# Altium PCB PCB_Attiny_composant.PcbDoc
Units mm, origin at the board's own origin, x right, y up, seen from the top; angles counter-clockwise.
Board outline 57.91 x 55.63 mm, 2 copper layers (Top Layer, Bottom Layer); 20 components, 23 nets, 92 pads, 17 vias.
Unrouted connection lines stored in the file: 3.
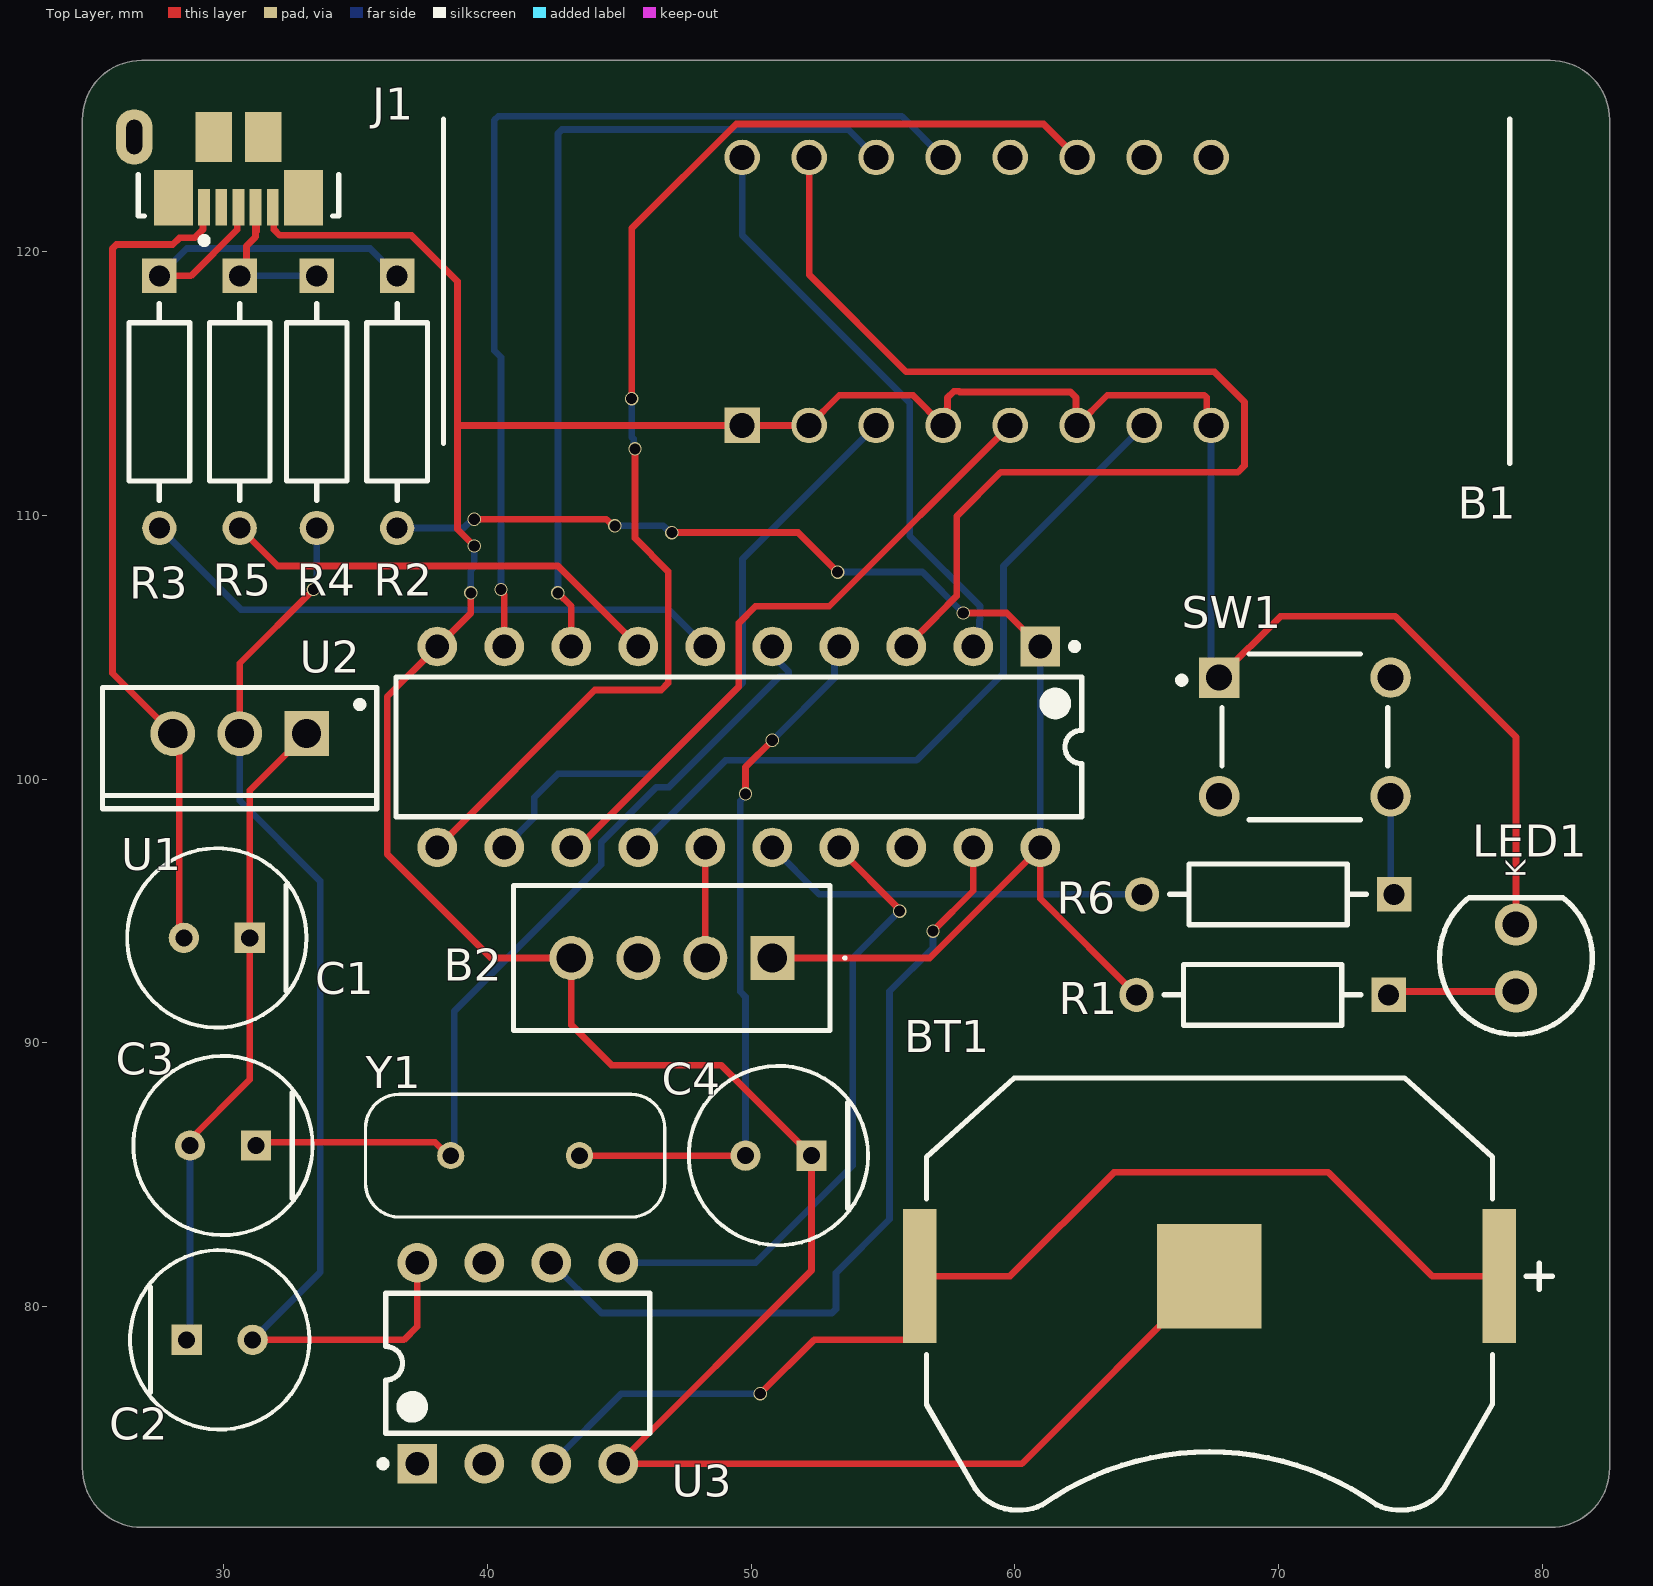
[diagram p0: Top Layer view]
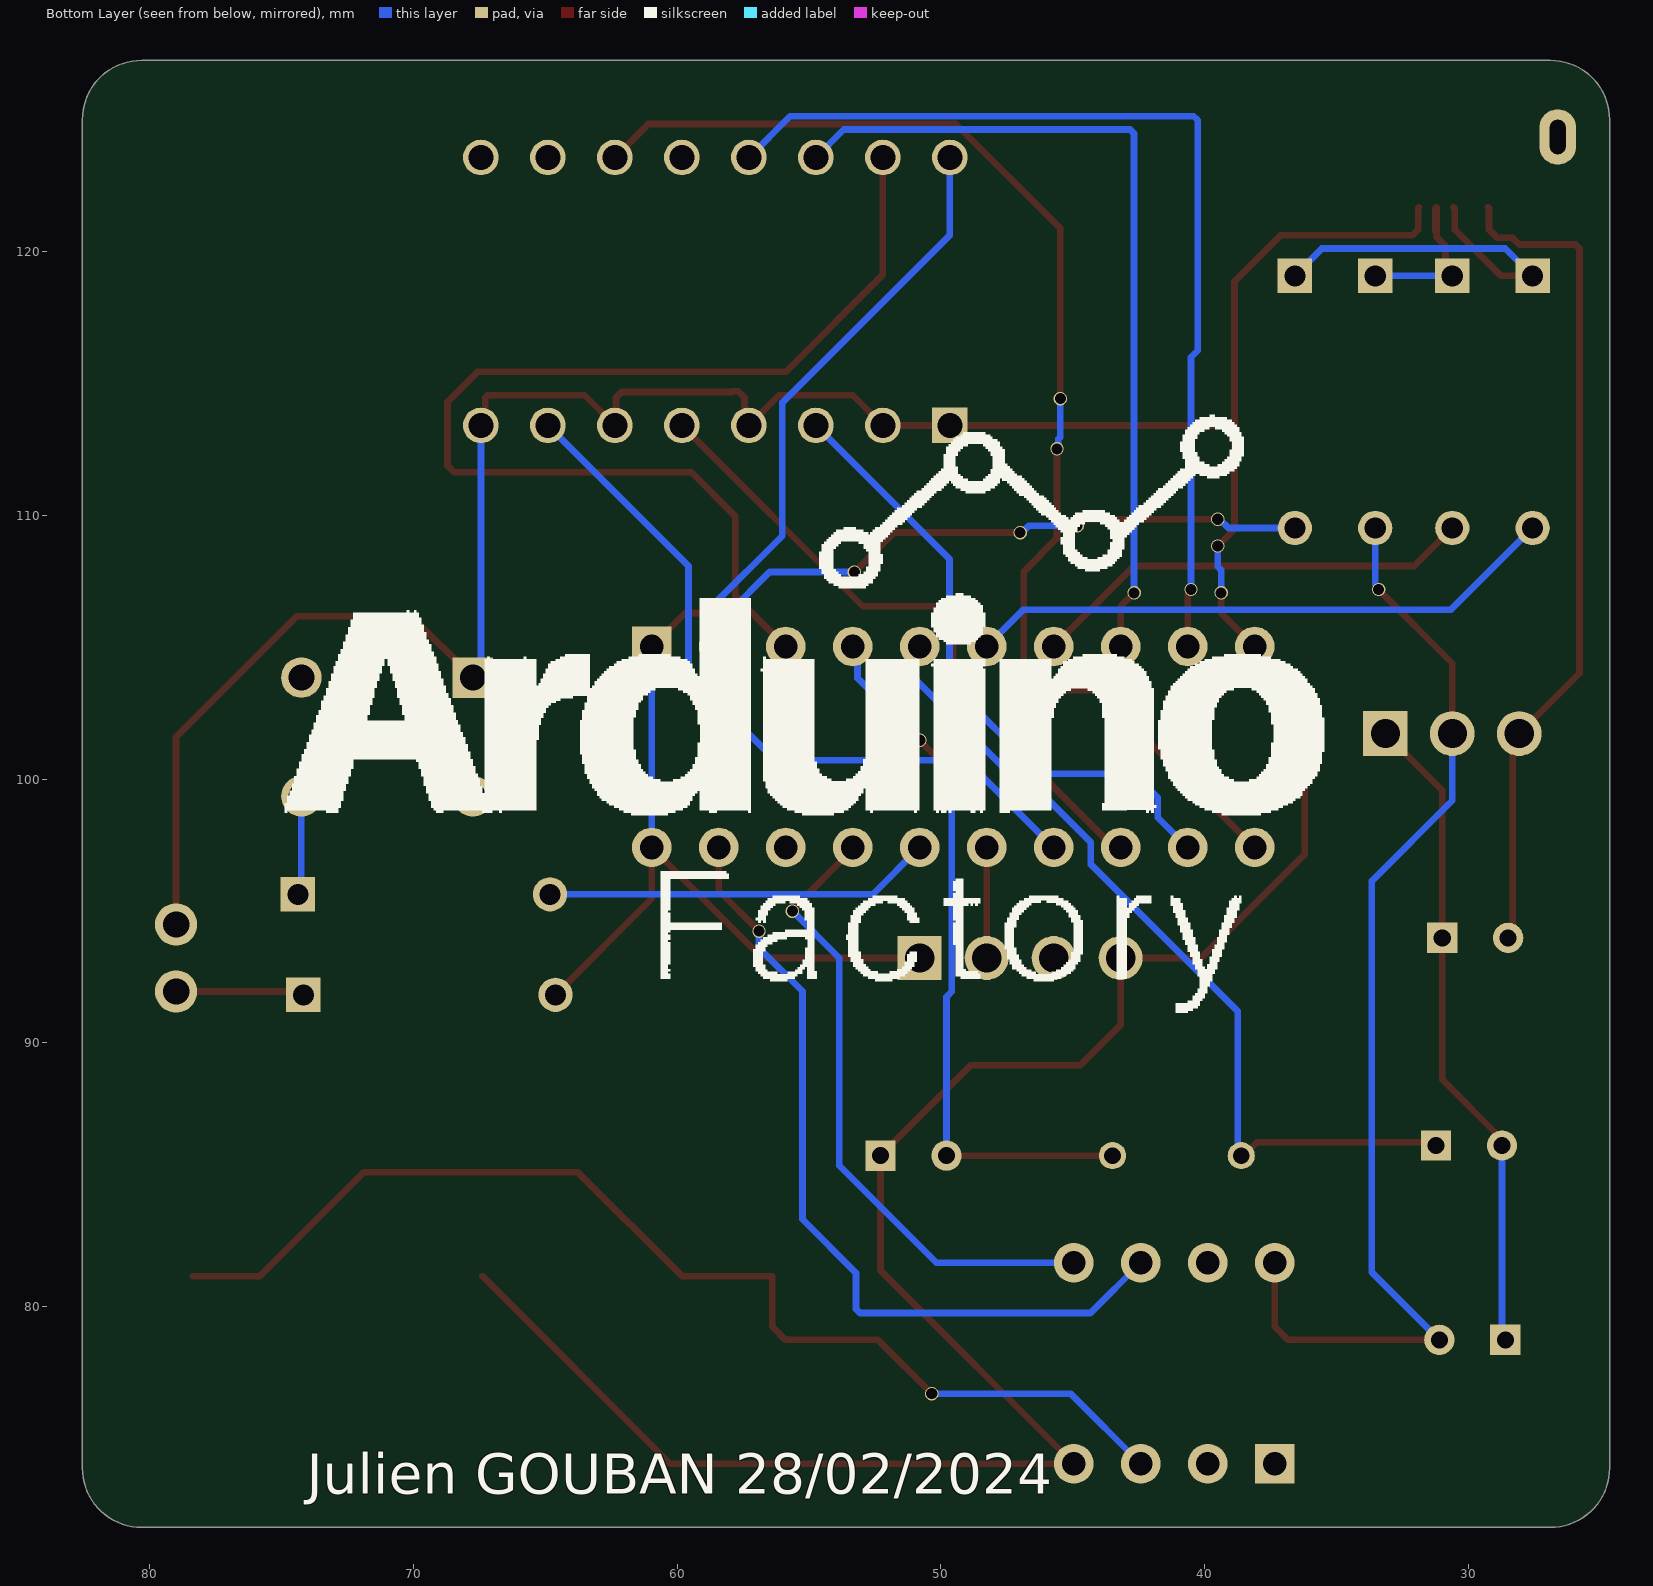
[diagram p1: Bottom Layer view, seen from below]
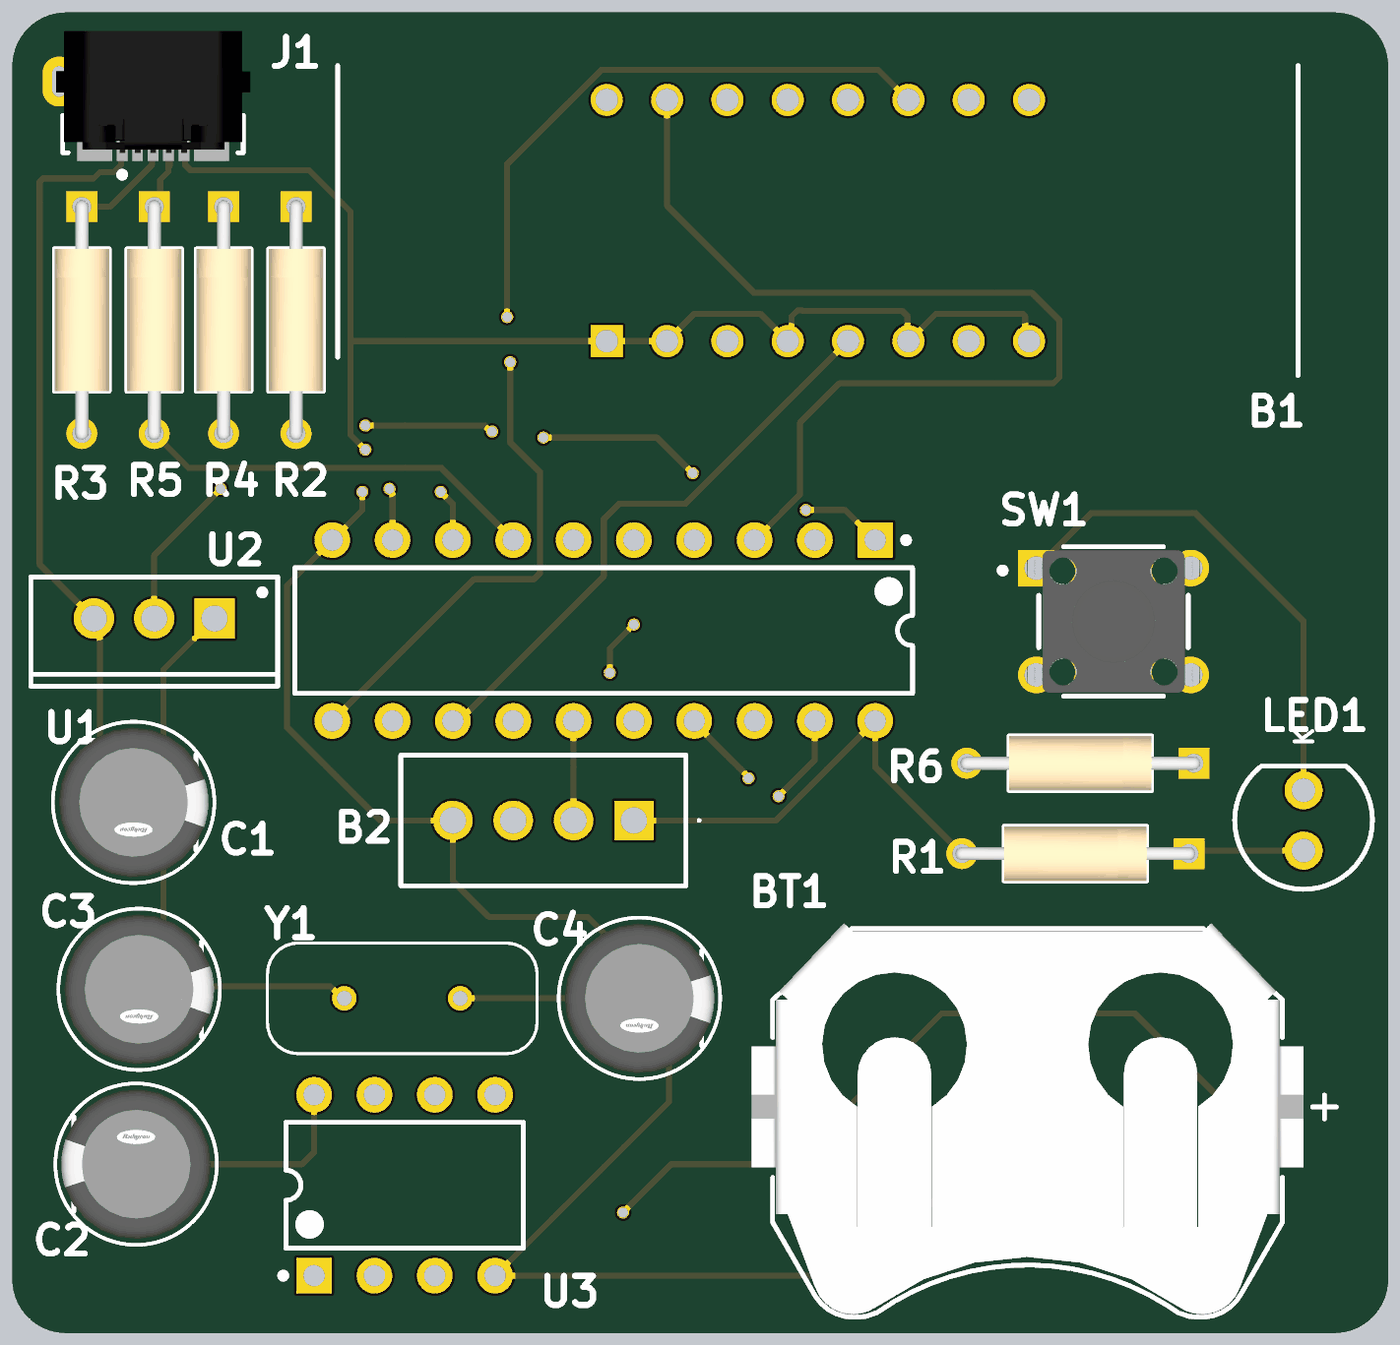
[diagram p2: 3D render of the assembled board from above, using the file's embedded part models]

## Layer stack, top to bottom
Top Solder: solder mask 0.0102, Solder Resist, Dk 3.5
Top Layer: signal copper 0.0356
Dielectric 1: dielectric 0.32, FR-4, Dk 4.8
Bottom Layer: signal copper 0.0356
Bottom Solder: solder mask 0.0102, Solder Resist, Dk 3.5

## Board outline
24.638,73.882 24.638,125 cw(c26.892,125) 26.892,127.254 80.296,127.254 cw(c80.296,125) 82.55,125 82.55,73.882 cw(c80.296,73.882) 80.296,71.628 26.892,71.628 cw(c26.892,73.882)

## Design rules (kind name [scope] priority, off if disabled: settings)
Clearance Clearance_1 [OnMid vs OnMid] p1: gap=0.254 ignorepadtopadclearanceinfootprint=FALSE sourcerule=36 cellrowname=All cellrowtype=0 cellcolname=All cellcoltype=0 innerlayers=TRUE
Clearance Clearance_2 [(ExistsOnLayer('Top Layer') Or ExistsOnLayer('Bottom Layer')) vs (ExistsOnLayer('Top Layer') Or ExistsOnLayer('Bottom Layer'))] p2: gap=0.254 ignorepadtopadclearanceinfootprint=FALSE sourcerule=36 cellrowname=All cellrowtype=0 cellcolname=All cellcoltype=0 outerlayers=TRUE
Clearance [All] p3: gap=0.254 ignorepadtopadclearanceinfootprint=FALSE ismatrix=TRUE
ComponentClearance [All] p1: gap=0 collisioncheckmode=3 verticalgap=0 showdistances=TRUE
PolygonConnect [All] p1: connectstyle=Relief reliefconductorwidth=0.254 reliefentries=4 polygonreliefangle="90 Angle" airgapwidth=0.254
RoutingVias [All] p1: holewidth=0.711 width=1.27 viastyle="Through Hole" minholewidth=0.711 minwidth=1.27 maxholewidth=0.711 maxwidth=1.27
SolderMaskExpansion [All] p1: expansion=0.102 istentingtop=FALSE
Width [All] p1: maxlimit=0.254 minlimit=0.254 preferedwidth=0.254
29 further rules are at their usual default settings.

## Classes and differential pairs
component class Capteur_et_RTC: B2 BT1 R6 SW1 U3
component class Afficheur_7_segments: B1
component class Schema_Attiny_composant: C1 C2 C3 C4 J1 LED1 R1 R2 R3 R4 R5 U1 U2 Y1

## Components (designator, comment, footprint, x,y, rotation, side; value= is the part's Value field where it differs from the comment)
B1 "LTC-4727JR" DIP1016W75P254L4018H725Q16N 58.547,118.491 r90 top
B2 "Capteur température DHT11" 386 50.8,93.218 r180 top
BT1 "3034TR" Keystone_0_MFG 67.374,80.48 r180 top
C1 "10uF" Rubycon_0_MFG 29.738,93.98 r180 top
C2 "10uF" Rubycon_0_MFG 29.845,78.74 r0 top
C3 "27uF" Rubycon_0_MFG 29.972,86.106 r180 top
C4 "27uF" Rubycon_0_MFG 51.034,85.725 r180 top
J1 "105164-0001" Molex_105164-0001_0 30.558,124.697 r270 top
LED1 "151051RS11000" "Type 5mm" 78.994,93.218 r90 top
R1 "68ohms" Stackpole_Electronics_Inc._CF14JT1K00_0 69.388,91.821 r180 top
R2 "1M" Stackpole_Electronics_Inc._CF14JT1K00_0 36.576,114.3 r270 top
R3 "68ohms" Stackpole_Electronics_Inc._CF14JT1K00_0 27.559,114.3 r270 top
R4 "1K5" Stackpole_Electronics_Inc._CF14JT1K00_0 33.528,114.3 r270 top
R5 "68ohms" Stackpole_Electronics_Inc._CF14JT1K00_0 30.607,114.3 r270 top
R6 "10kohms" Stackpole_Electronics_Inc._CF14JT1K00_0 69.596,95.631 r180 top
SW1 "1825910-2" TE_0_0 70.993,101.6 r0 top
U1 "LD1086V33" TO220 30.607,101.727 r180 top
U2 "ATtiny2313A-PU" 20P3 49.53,101.219 r270 top
U3 "DS1307N" P8-2 41.148,77.851 r90 top
Y1 "ECS-120-S-4X" XTAL_ECS-120-S-4X 41.048,85.725 r180 top

## Footprints (in the part's own frame and the unit in brackets; to place one, negate y for a bottom-side part, rotate by r counter-clockwise, add the part's x,y. Pads: shape width x height; smd on the part's side, far side on the other; paste and mask are expansions set on the pad)
20P3 [mm] "DIP, 20-Pin, Row Spacing 7.62 mm, Pitch 2.54 mm"
  rect 1.5x1.5 hole 0.9: 1(-3.81,11.43)
  round 1.5 hole 0.9: 2(-3.81,8.89) 3(-3.81,6.35) 4(-3.81,3.81) 5(-3.81,1.27) 6(-3.81,-1.27) 7(-3.81,-3.81) 8(-3.81,-6.35) 9(-3.81,-8.89) 10(-3.81,-11.43) 11(3.81,-11.43) 12(3.81,-8.89) 13(3.81,-6.35) 14(3.81,-3.81) 15(3.81,-1.27) 16(3.81,1.27) 17(3.81,3.81) 18(3.81,6.35) 19(3.81,8.89) 20(3.81,11.43)
  silkscreen extent -3.93,-13 2.65,13, body extent -3.6,-12.95 3.6,12.95, height 5.08
386 [mm]
  rect 1.665x1.665 hole 1.11: 1(0,0)
  round 1.665 hole 1.11: 2(2.54,0) 3(5.08,0) 4(7.62,0)
  silkscreen extent -2.8,-2.75 9.81,2.75
DIP1016W75P254L4018H725Q16N [mm]
  rect 1.35x1.35 / inner round 1.35 / far side rect 1.35x1.35 hole 0.95: 1(-5.08,8.89)
  round 1.35 hole 0.95: 2(-5.08,6.35) 3(-5.08,3.81) 4(-5.08,1.27) 5(-5.08,-1.27) 6(-5.08,-3.81) 7(-5.08,-6.35) 8(-5.08,-8.89) 9(5.08,-8.89) 10(5.08,-6.35) 11(5.08,-3.81) 12(5.08,-1.27) 13(5.08,1.27) 14(5.08,3.81) 15(5.08,6.35) 16(5.08,8.89)
  silkscreen extent -6.53,-20.21 6.53,20.21
Keystone_0_MFG [mil]
  rect 156x156 smd paste-39370.1 mask+0: 1(0,-26.5)
  rect 50x200 smd paste+0 mask+0: 2(-432.48,-26.5) 2(432.48,-26.5)
  silkscreen extent -512,-322 422,323, body extent -461,-326 461,326, height 10
Molex_105164-0001_0 [mm]
  rect 1.38x0.45 smd paste+0 mask+0: 1(3.01,-1.3) 2(3.01,-0.65) 3(3.01,0) 4(3.01,0.65) 5(3.01,1.3)
  rect 2.1x1.475 smd paste+0 mask+0: 7(2.65,2.462) 10(2.65,-2.462)
  rect 1.9x1.375 smd paste+0 mask+0: 8(0.35,0.937) 9(0.35,-0.937)
  oval 2.1x1.4 hole 0.6 slot 1.3 at 0 deg paste-2539.97 mask+0: 11(0.35,-3.95)
  silkscreen extent 1.78,-3.8 4.4,3.8, body extent -2.05,-4.75 3.8,4.75, height 0.25
P8-2 [mm] "DIP, 8-Leads, Row Spacing 7.62mm, Pitch 2.54mm, Body 9.4x7mm"
  rect 1.5x1.5 hole 0.9: 1(-3.81,3.81)
  round 1.5 hole 0.9: 2(-3.81,1.27) 3(-3.81,-1.27) 4(-3.81,-3.81) 5(3.81,-3.81) 6(3.81,-1.27) 7(3.81,1.27) 8(3.81,3.81)
  silkscreen extent -3.93,-5 2.65,5.23
Rubycon_0_MFG [mm]
  rect 1.15x1.15 hole 0.65 paste-2539.97 mask+0: 1(-1.25,0)
  round 1.15 hole 0.65 paste-2539.97 mask+0: 2(1.25,0)
  silkscreen extent -3.4,-3.4 3.4,3.4, body extent -3.5,-3.5 3.5,3.5, height 0.25
Stackpole_Electronics_Inc._CF14JT1K00_0 [mm]
  rect 1.3x1.3 hole 0.8 paste-2539.97 mask+0: 1(-4.78,0)
  round 1.3 hole 0.8 paste-2539.97 mask+0: 2(4.78,0)
  silkscreen extent -3.73,-1.15 3.73,1.15, body extent -5.53,-1.4 5.53,1.4, height 0.25
TE_0_0 [mm]
  rect 1.54x1.54 hole 0.99 paste-2539.97 mask+0: 1(-3.25,2.25)
  round 1.54 hole 0.99 paste-2539.97 mask+0: 2(3.25,2.25) 3(-3.25,-2.25) 4(3.25,-2.25)
  silkscreen extent -4.79,-3.15 3.15,3.15, body extent -4.12,-3.24 4.12,3.24, height 0.25
TO220 [mm] "TO, Thru-Hole, Vertical, Heatsink Mounted; 3 In-Line Leads; Pitch 2.54 mm"
  rect 1.7x1.7 hole 1.1: 1(-2.54,0)
  round 1.7 hole 1.1: 2(0,0) 3(2.54,0)
  silkscreen extent -5.2,-1.75 5.2,2.85, body extent -5.25,-1.8 5.25,2.9, height 19.7
"Type 5mm" [mm] "THT, LED-5mm, 2pin- Body 5.8mm"
  round 1.6 hole 1: 1(1.27,0) 2(-1.27,0)
  silkscreen extent -2.9,-2.9 2.29,2.9
XTAL_ECS-120-S-4X [mm]
  round 1.03 hole 0.63: 1(-2.44,0) 2(2.44,0)
  silkscreen extent -5.68,-2.33 5.68,2.33

## Part data
B1: "Displays Panel 4DIGIT 35LED Sup. Red CC 14-Pin DIP Module", Manufacturer_Name=Lite-On, Mouser Part Number=859-LTC-4727JR, Arrow Part Number=LTC-4727JR, Arrow Price/Stock=https://www.arrow.com/en/products/ltc-4727jr/lite-on-technology?region=nac, Datasheet Link=https://componentsearchengine.com/Datasheets/1/LTC-4727JR.pdf, Geometry.Height=7.25mm, Manufacturer_Part_Number=LTC-4727JR, Mouser Price/Stock=https://www.mouser.co.uk/ProductDetail/Lite-On/LTC-4727JR?qs=WxFF5lh7QM1aHvF1YvDORQ%3D%3D
B2: library part 386, "Adafruit Accessories DHT11 Basic Temp Humidity Sensor", Manufacturer_Name=Adafruit, Mouser Part Number=485-386, Arrow Part Number=386, Arrow Price/Stock=https://www.arrow.com/en/products/386/adafruit-industries?region=nac, Datasheet Link=https://datasheet.datasheetarchive.com/originals/distributors/DKDS-1/1982.pdf, Geometry.Height=15.5mm, Manufacturer_Part_Number=386, Mouser Price/Stock=https://www.mouser.co.uk/ProductDetail/Adafruit/386?qs=GURawfaeGuDbeGFpZ2393w%3D%3D
C1 C2 C3 C4: library part 35ZLH100MEFC6_3X11
LED1: "THT LED round mono-color color lens, WL-TMRW, Red", Emitting color=Red, Manufacturer="Wuerth Elektronik", ComponentLink1Description="Manufacturer URL", ComponentLink1URL=http://www.we-online.com, ComponentLink2Description=Datasheet, ComponentLink2URL=http://katalog.we-online.de/pbs/datasheet/7448042001.pdfhttp://katalog.we-online.de/pbs/datasheet/7448042001.pdfhttp://katalog.we-online.de/pbs/datasheet/7448042001.pdfhttp://katalog.we-online.de/pbs/datasheet/151051RS11000.pdf, PackageReference="Type 5mm", PartNumber=151051RS11000
R1 R2 R3 R4 R5 R6: library part MF0207FTE52-10K
U1: "1.5A, Low Drop Positive Voltage Regulator, 3.3V, 3-Pin TO-220", ComponentLink1Description="Manufacturer URL", ComponentLink1URL=http://www.st.com, ComponentLink2Description=Datasheet, ComponentLink2URL=http://www.st.com/internet/com/TECHNICAL_RESOURCES/TECHNICAL_LITERATURE/DATASHEET/CD00001884.pdf, ComponentLink3Description="Package Specification", ComponentLink3URL=http://www.st.com/internet/com/TECHNICAL_RESOURCES/TECHNICAL_LITERATURE/PACKAGE_INFORMATION/CD00004649.pdf, DatasheetVersion=11/07/2011, PackageDescription="TO, Thru-Hole, Vertical, Heatsink Mounted; 3 In-Line Leads; Pitch 2.54 mm", PackageReference=TO220, PackageVersion=ver3.0, PartNumber=LD1086V33
U2: library part ATTINY2313A-PU, "8-bit AVR Microcontroller, 1.8-5.5V, 2KB Flash, 128 Bytes EEPROM, 128 Bytes SRAM, 20-pin PDIP, Industrial Grade (-40°C to 85°C), Pb-Free", Code_JEDEC=MS-001-AD, DatasheetVersion="revA, Dec-2009", PackageDescription="20-lead (0.300\"/7.62mm Wide) Plastic Dual Inline Package (PDIP)", PackageReference=20P3, PackageVersion="revC, Jan-2004", PartNumber=ATTINY2313A-PU
U3: "64 x 8, Serial, I2C Real-Time Clock, 5.0V, 8-Pin PDIP, -40 to 85 degC", Code_JEDEC=MS-001-AB, ComponentLink1Description="Manufacturer URL", ComponentLink1URL=http://www.maxim-ic.com, ComponentLink2Description=Datasheet, ComponentLink2URL=http://datasheets.maxim-ic.com/en/ds/DS1307.pdf, ComponentLink3Description="Package Specification", ComponentLink3URL=http://pdfserv.maxim-ic.com/package_dwgs/21-0043.PDF, DatasheetVersion=10-Feb-2008, PackageDescription="8-Pin Plastic Dual-In-Line, Narrow (0.3in), Pitch 2.54 mm, PDIP(N)", PackageReference=P8-2, PackageVersion="revE, 2011", PartNumber=DS1307N
Y1: "CRYSTAL T/H", Package=None, Availability=Unavailable, MP=ECS-120-S-4X, Price=None

## Via types
v1: diameter 0.508, hole 0.422, Top Layer to Bottom Layer, 16 vias
v2: diameter 0.508, hole 0.42, Top Layer to Bottom Layer, 1 vias

## Nets (pads, with @x,y where several pads share a name; then routed paths per layer and width w, separated by ;. In a path a pad name is that pad's centre, name@x,y a point inside that pad or via, vN(x,y) a via of type N, cw(c..) or ccw(c..) an arc to the next point about the centre after c; other vN are vias at no path point)
+3.3V: B2.1 C2.2 R1.2 R2.2 R4.2 R6.1 SW1.4 U1.2 U2.1 U2.20 U3.8 | length 100.1
  Top Layer w0.254: U1.2 30.607,104.394 v1(33.401,107.188) ; C2.2 36.83,78.74 37.338,79.248 U3.8 ; v1(39.497,109.855) 44.508,109.855 44.762,109.601 v1(44.831,109.601) ; v1(46.99,109.347) 51.78,109.347 v1(53.277,107.85) ; B2.1 56.769,93.218 U2.20 60.96,95.469 R1.2 ; v1(58.039,106.299) 59.69,106.299 U2.1
  Bottom Layer w0.254: U1.2 30.607,99.187 33.655,96.139 33.655,81.3 C2.2 ; v1(33.401,107.188) 33.401,107.257 33.528,107.384 R4.2 ; R2.2 39.093,109.52 39.428,109.855 v1(39.497,109.855) ; v1(44.831,109.601) 46.667,109.601 46.921,109.347 v1(46.99,109.347) ; v1(53.277,107.85) 56.488,107.85 v1(58.039,106.299) ; U2.20 U2.1 ; SW1.4 74.243,95.764 R6.1
ANODE_ALI: B1.14 U2.8 | length 32.2
  Top Layer w0.254: v1(42.672,107.061) 43.18,106.553 U2.8
  Bottom Layer w0.254: v1(42.672,107.061) 42.672,124.478 42.821,124.627 53.681,124.627 B1.14
ANODE_BL2: B1.16 U2.2 | length 22.4
  Bottom Layer w0.254: B1.16 49.657,120.629 56.007,114.279 56.007,109.229 58.674,106.562 58.674,106.036 58.658,106.02 58.658,105.267 U2.2
ANODE_CL3: B1.13 U2.9 | length 37.8
  Top Layer w0.254: v1(40.513,107.188) 40.513,107.119 40.64,106.992 U2.9
  Bottom Layer w0.254: v1(40.513,107.188) 40.513,115.994 40.259,116.248 40.259,124.986 40.408,125.135 55.713,125.135 B1.13
ANODE_D: B1.3 U2.12 | length 23.9
  Bottom Layer w0.254: U2.12 41.775,98.544 41.775,99.306 42.672,100.203 46.228,100.203 49.669,103.644 49.669,108.343 B1.3
ANODE_DP: B1.7 U2.14 | length 28.2
  Bottom Layer w0.254: U2.14 49.022,100.711 56.261,100.711 59.563,104.013 59.563,108.077 B1.7
ANODE_E: B1.5 U2.13 | length 24.7
  Top Layer w0.254: U2.13 43.434,97.409 49.53,103.505 49.53,105.918 50.165,106.553 52.959,106.553 B1.5
ANODE_F: B1.11 U2.11 | length 48.2
  Top Layer w0.254: U2.11 44.069,103.378 46.587,103.378 46.851,103.642 46.851,107.878 45.593,109.136 v1(45.593,112.522) ; v1(45.466,114.427) 45.466,120.873 49.434,124.841 61.087,124.841 B1.11
  Bottom Layer w0.254: v1(45.466,114.427) 45.466,112.972 45.544,112.893 45.544,112.571 v1(45.593,112.522)
ANODE_G: B1.15 U2.3 | length 42.8
  Top Layer w0.254: B1.15 52.197,119.126 55.88,115.443 67.564,115.443 68.707,114.3 68.707,111.887 68.453,111.633 59.458,111.633 57.788,109.963 57.788,106.946 57.038,106.196 57.038,106.187 U2.3
BOUTON: R6.2 U2.16 | length 14.8
  Bottom Layer w0.254: U2.16 52.578,95.631 R6.2
DHT11_DATA: B2.2 U2.15 | length 4.2
  Top Layer w0.254: B2.2 U2.15
GND: B1.1 B1.2 B1.4 B1.6 B1.8 B2.4 BT1.1 C1.1 C2.1 C3.2 C4.1 J1.5 LED1.1 SW1.1 U1.1 U2.10 U3.4 | length 183.6
  Top Layer w0.254: C3.2@28.615,86.233 30.988,88.606 C1.1 30.988,99.568 U1.1 ; J1.5 31.901,121.643 31.901,120.839 32.125,120.616 37.118,120.616 38.862,118.872 38.862,113.411 ; v1(39.37,107.061) 39.37,106.299 U2.10 36.195,103.124 36.195,97.155 40.132,93.218 B2.4 43.18,90.678 44.704,89.154 48.855,89.154 C4.1 52.284,81.367 U3.4 60.262,74.041 BT1.1 ; v1(39.497,108.839) 38.862,109.474 38.862,113.411 ; B1.8 67.27,113.578 67.27,114.467 67.183,114.554 63.5,114.554 B1.6 62.317,113.451 62.317,114.467 62.103,114.681 57.912,114.681 57.89,114.703 57.68,114.703 57.444,114.467 57.444,113.578 B1.4 56.134,114.554 53.34,114.554 B1.2 B1.1 38.862,113.411 ; SW1.1 70.065,106.172 74.422,106.172 78.994,101.6 LED1.1
  Bottom Layer w0.254: C2.1 28.722,78.867 C3.2 ; v1(39.37,107.061) 39.37,107.926 39.497,108.053 v1(39.497,108.839) ; B1.4@57.268,113.42 B1.4 B1.4@57.277,113.708 ; B1.8 67.437,104.156 SW1.1
NetBT1_2: BT1.2 U3.3 | length 43.3
  Top Layer w0.254: v1(50.345,76.7) 52.385,78.74 55.881,78.74 56.389,79.248 56.389,81.153 59.817,81.153 63.754,85.09 71.882,85.09 75.819,81.153 BT1.2@78.359,81.153
  Bottom Layer w0.254: U3.3 45.077,76.7 v1(50.345,76.7)
NetC1_2: C1.2 J1.1 U1.3 | length 31.9
  Top Layer w0.254: C1.2 28.317,94.151 28.317,101.477 U1.3 25.781,104.013 25.781,120.12 25.93,120.269 28.067,120.269 28.321,120.523 28.897,120.523 29.214,120.839 29.214,121.643 J1.1
NetJ1_3: J1.3 R2.1 R3.1 | length 14.4
  Top Layer w0.254: R3.1 28.754,119.08 30.514,120.839 30.514,121.643 J1.3
  Bottom Layer w0.254: R3.1 28.599,120.12 35.56,120.12 35.56,120.096 R2.1
NetJ1_4: J1.4 R4.1 R5.1 | length 6.7
  Top Layer w0.254: R5.1@30.861,119.08 30.861,120.212 31.208,120.559 J1.4 31.251,121.643 31.251,120.771
  Bottom Layer w0.254: R5.1@30.861,119.08 R4.1@33.909,119.08
NetLED1_2: LED1.2 R1.1 | length 4.9
  Top Layer w0.254: R1.1 74.295,91.948 LED1.2
PD2: R3.2 U2.6 | length 22.6
  Bottom Layer w0.254: R3.2 30.653,106.426 46.863,106.426 U2.6
PD3: R5.2 U2.7 | length 17
  Top Layer w0.254: R5.2 32.05,108.077 42.672,108.077 U2.7
RTC_SCL: U2.19 U3.6 | length 31.3
  Top Layer w0.254: v2(56.891,94.239) 58.42,95.767 U2.19
  Bottom Layer w0.254: U3.6 44.323,79.756 53.064,79.756 53.213,79.905 53.213,81.28 55.245,83.312 55.245,91.957 56.891,93.604 v2(56.891,94.239)
RTC_SDA: U2.17 U3.5 | length 24.2
  Top Layer w0.254: U2.17 53.34,97.346 55.626,95.059 v1(55.626,94.996)
  Bottom Layer w0.254: U3.5 50.165,81.661 53.848,85.344 53.848,93.218 v1(55.626,94.996)
XTAL1: C3.1 U2.5 Y1.2 | length 33.1
  Top Layer w0.254: C3.1@31.115,86.233 38.017,86.233 38.525,85.725 Y1.2@38.735,85.725
  Bottom Layer w0.254: Y1.2@38.735,85.725 38.735,91.186 44.311,96.762 44.311,97.599 46.407,99.695 46.889,99.695 51.08,103.886 51.413,103.886 51.413,104.079 50.8,104.692 U2.5
XTAL2: C4.2 U2.4 Y1.1 | length 27.1
  Top Layer w0.254: Y1.1@43.615,85.725 C4.2 ; v1(49.784,99.441) 49.784,100.457 v1(50.8,101.473)
  Bottom Layer w0.254: C4.2 49.784,91.745 49.586,91.942 49.586,99.175 49.784,99.372 v1(49.784,99.441) ; v1(50.8,101.473) 53.156,103.829 53.156,104.845 U2.4
pads on no net: B1.9 B1.10 B1.12 B2.3 J1.2 J1.7 J1.8 J1.9 J1.10 J1.11 SW1.2 SW1.3 U2.18 U3.1 U3.2 U3.7

## Silkscreen, mask and mechanical layers (free items; w line width, h text height)
Bottom Overlay:
  drawing of 14 lines, arcs and shapes, not listed
  text "Julien GOUBAN 28/02/2024" at 74.041,72.898 h1.52
Mechanical 1:
  the board outline again, w0.254

## Text inside footprints (layer, text, board x,y; h text height)
LED1: Top Overlay "K" at 79.375,96.266 h0.76 r90; Mechanical 15 "K" at 79.375,96.266 h0.76 r90